# EAGLE board PCB_heatedbed_Mk2a (EAGLE 6.4)
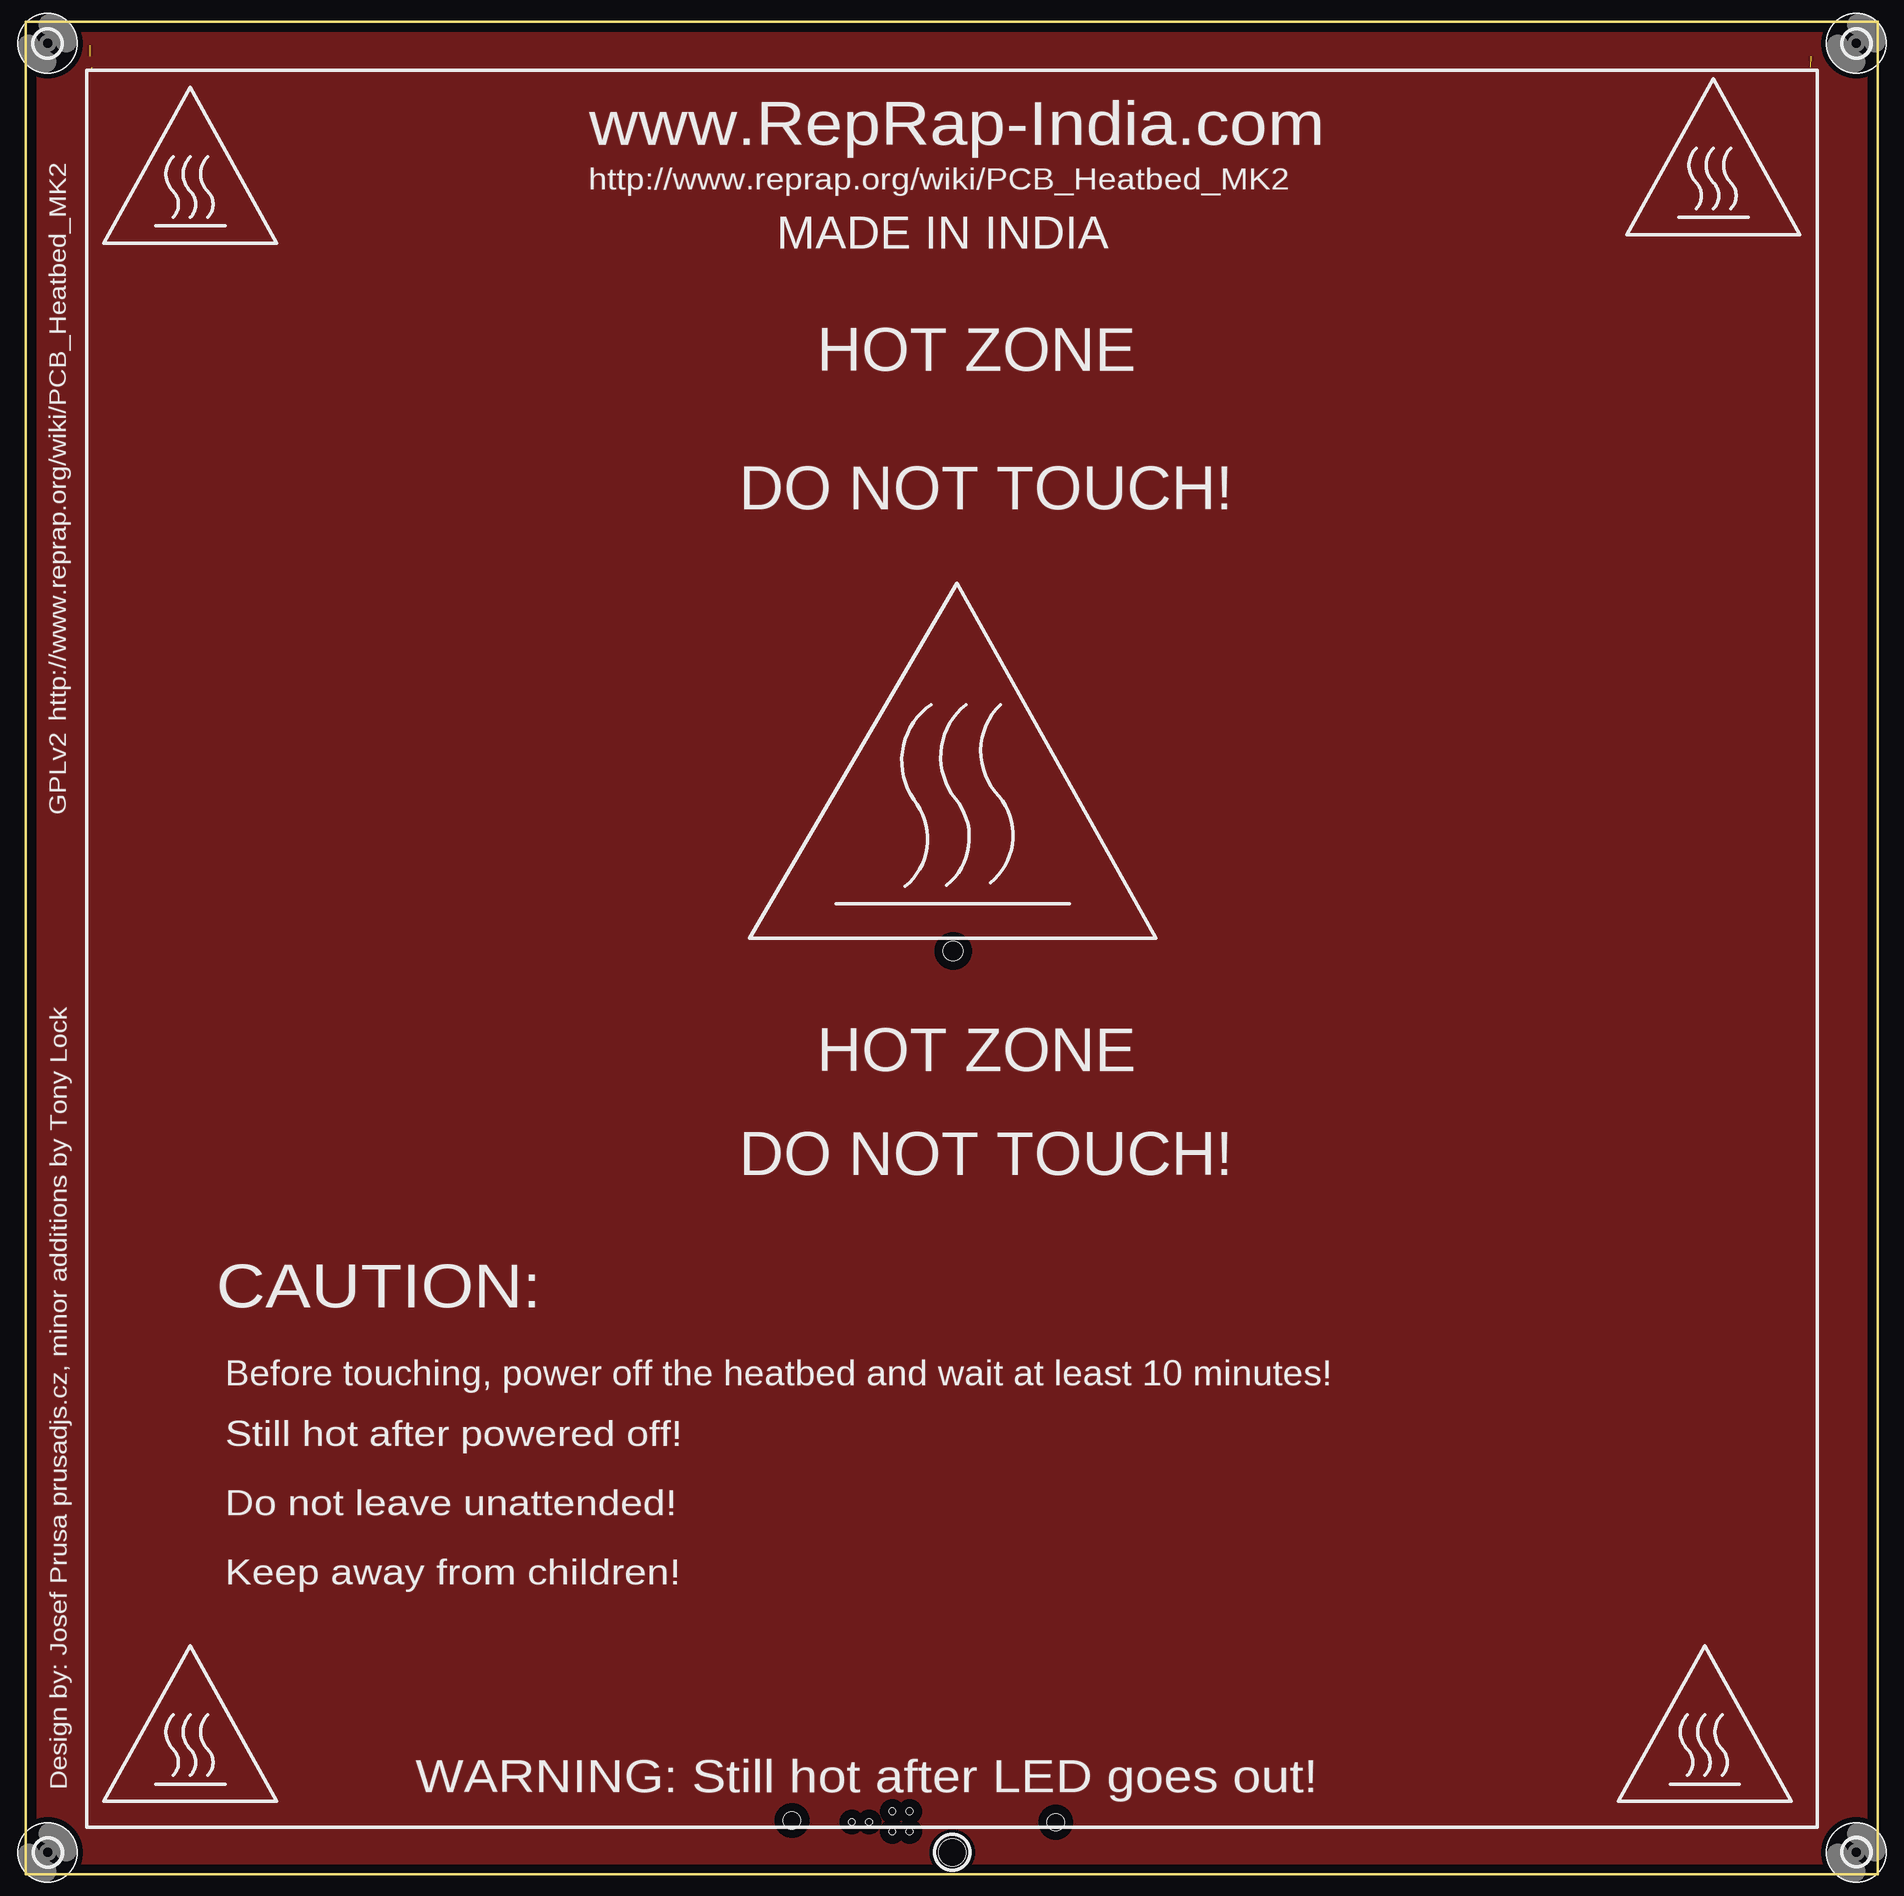
[diagram p0: board, top side]
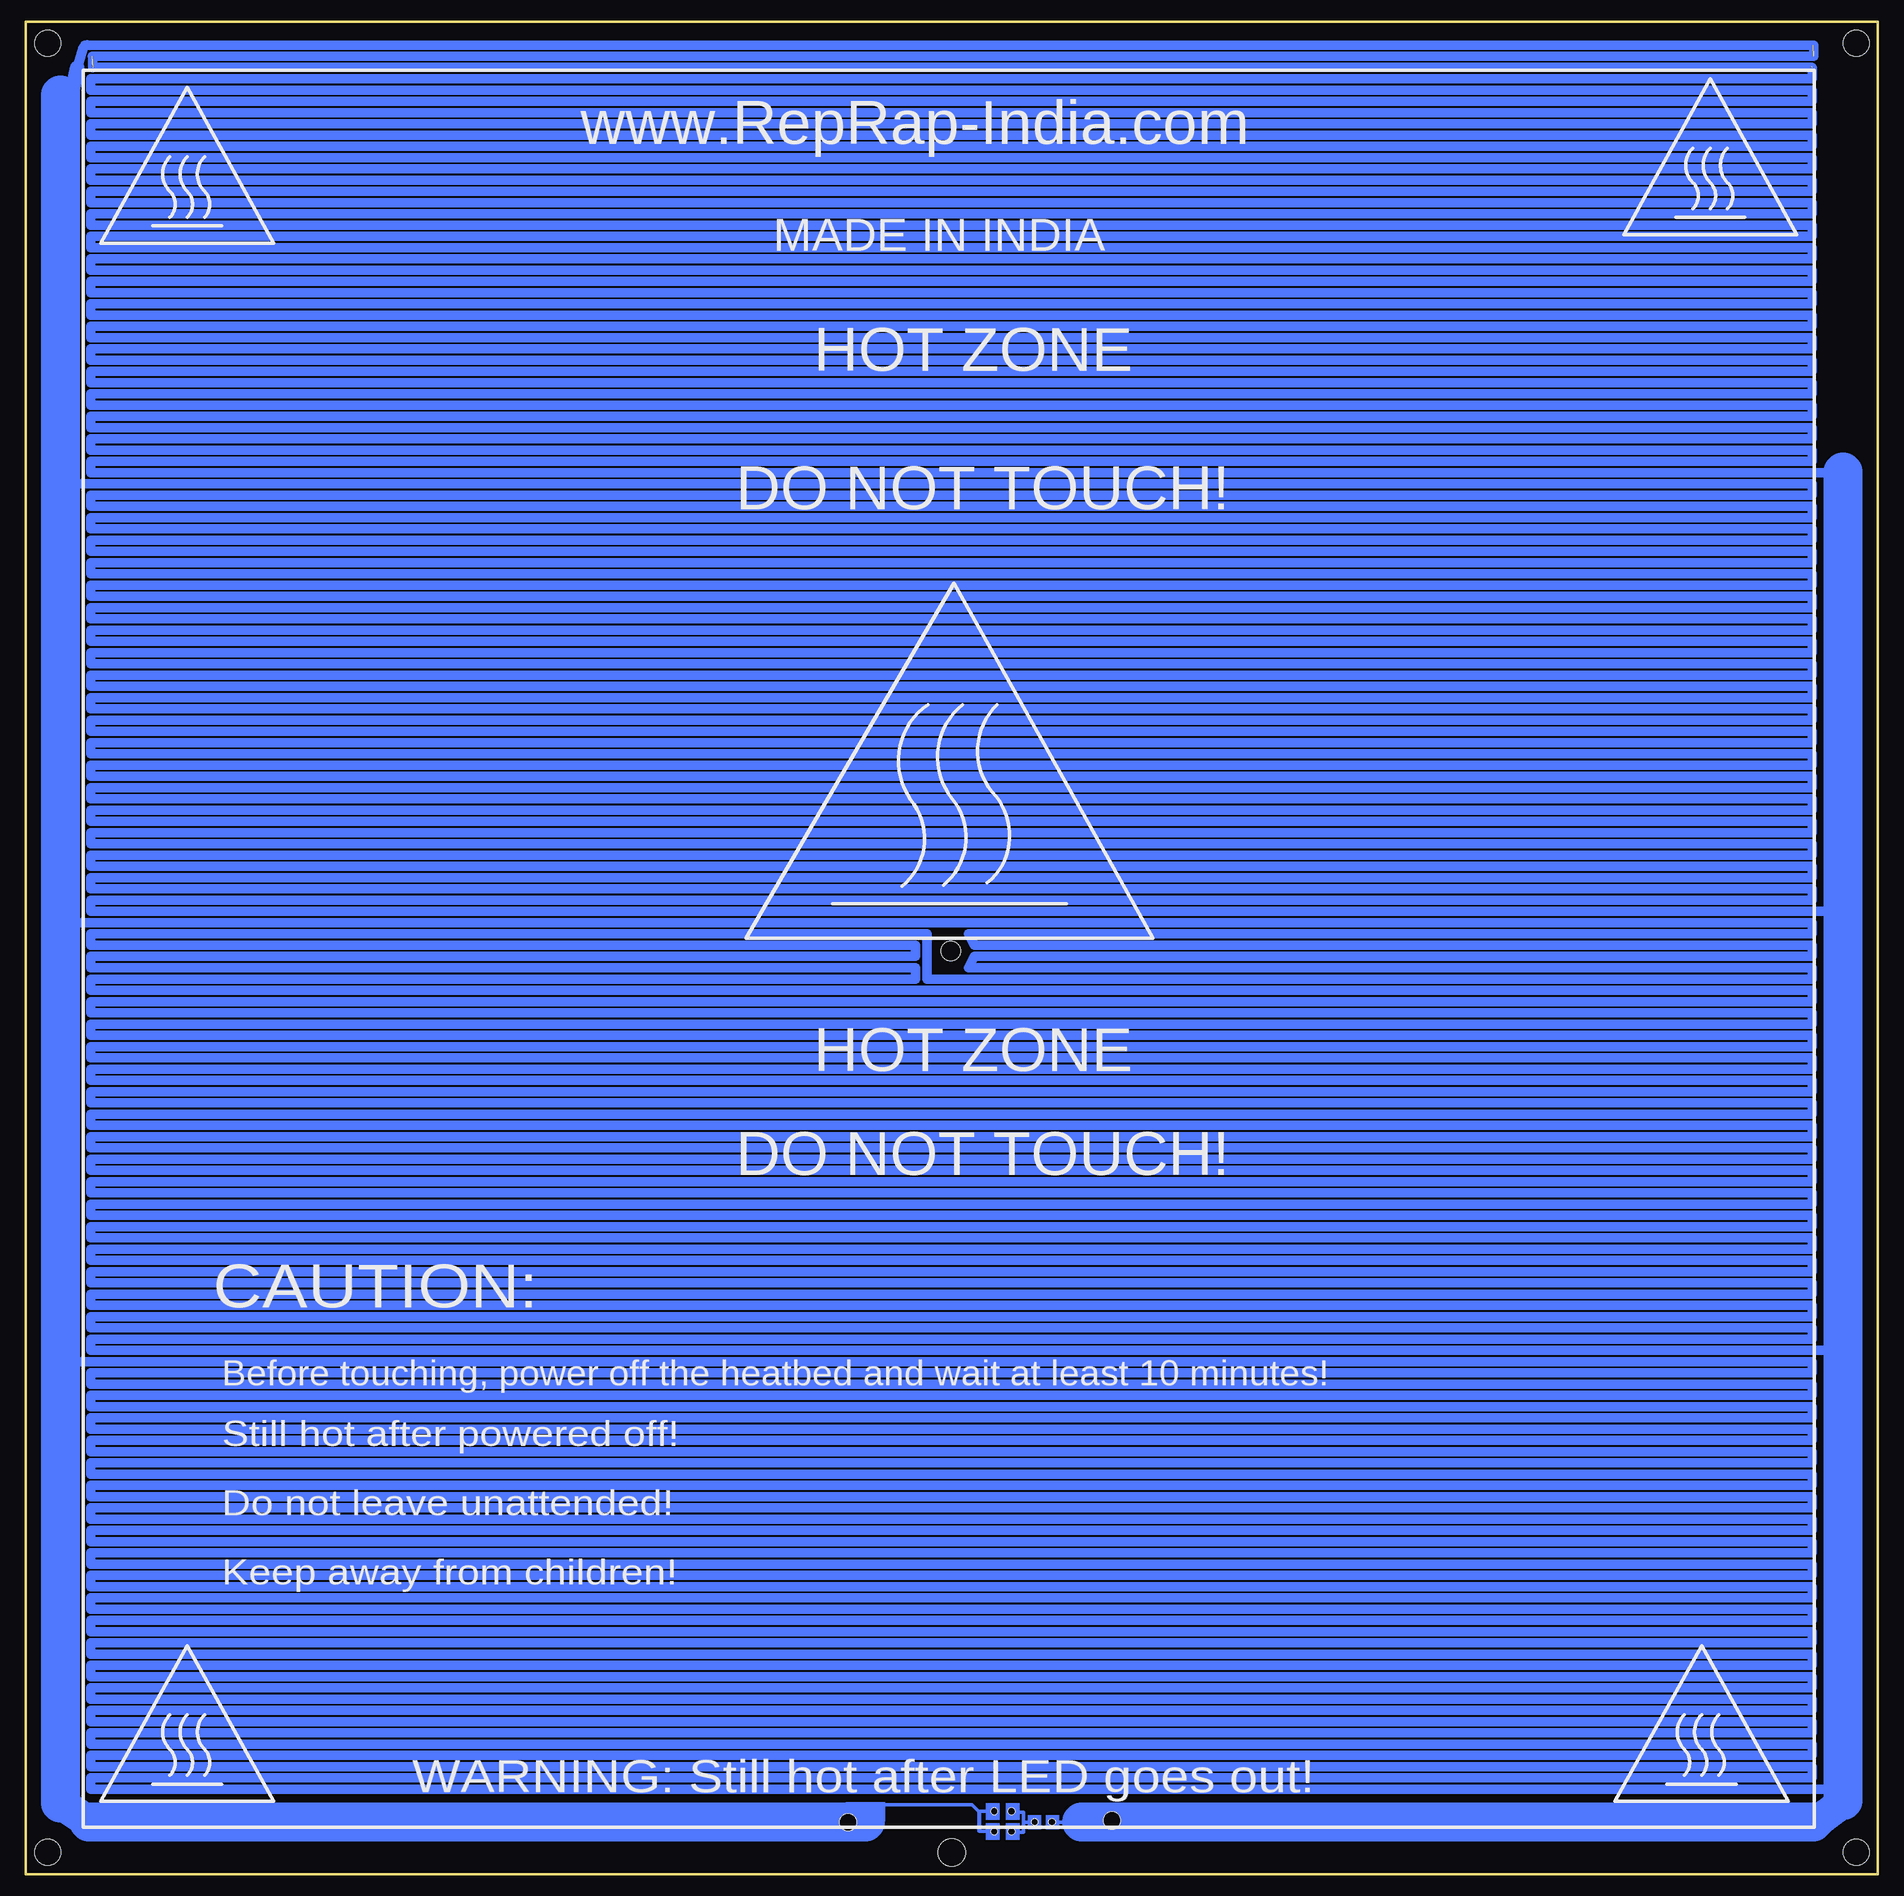
[diagram p1: board, bottom side, seen from below]

Size 214 x 214 mm. Coordinates in mm from the lower left corner, seen from the top.
Outline: 0,0 214,0 214,214 0,214 0,0
Copper layers (1*16): Top 0.035mm / dielectric 1.5mm / Bottom 0.035mm
Design rules "default": minimum track width 10mil, minimum drill 24mil, track to track 8mil, track to pad 8mil, pad to pad 8mil, via to via 8mil, smd to smd 8mil, copper to edge 40mil, drill to drill 8mil, minimum pad ring 10mil, minimum via ring 8mil, stop-mask expansion 4mil, vias tented up to drill 0mil, thermal gap 10mil
Holes 2.3 mm at 107.14,106.64 107.14,106.64
Holes 0.8 mm at 97.44,6 95.44,6 100.11,7.24 102.11,7.24 100.11,4.92 102.11,4.92
Holes 3.2 mm at 107.03,2.5
Holes 2 mm at 119,5.96 88.51,6.18

## Footprints (pad centres in the part's own frame; a part is rotated, then mirrored left to right if it is on the bottom)
3,0 = hole 3: 0,0

## Placement (x,y rotation side)
E$1  [3,0]  211.5,2.5 0 top
E$2  [3,0]  2.5,2.5 0 top
E$3  [3,0]  2.5,211.5 0 top
E$4  [3,0]  211.5,211.5 0 top

## Library data of the parts
E$1-E$4 = holes

## Tracks (layer width: path | path; a pad name or v marks a point on that pad's centre or on a via)
S$1
  Bottom 0.406: 103.8,7.19 103.85,7.19 104.68,8.02 116.18,8.02 116.21,8.05
S$2
  Bottom 0.305: 103.91,4.97 103.11,4.97
S$3
  Bottom 1.1: 6.3,9.8 206.5,9.8 206.5,11.1 7.6,11.1 7.6,12.4 206.5,12.4 206.5,13.7 7.6,13.7 7.6,15 206.5,15 206.5,16.3 7.6,16.3 7.6,17.6 206.5,17.6 206.5,18.9 7.6,18.9 7.6,20.2 206.5,20.2 206.5,21.5 7.6,21.5 7.6,22.8 206.5,22.8 206.5,24.1 7.6,24.1 7.6,25.4 206.5,25.4 206.5,26.7 7.6,26.7 7.6,28 206.5,28 206.5,29.3 7.6,29.3 7.6,30.6 206.5,30.6 206.5,31.9 7.6,31.9 7.6,33.2 206.5,33.2 206.5,34.5 7.6,34.5 7.6,35.8 206.5,35.8 206.5,37.1 7.6,37.1 7.6,38.4 206.5,38.4 206.5,39.7 7.6,39.7 7.6,41 206.5,41 206.5,42.3 7.6,42.3 7.6,43.6 206.5,43.6 206.5,44.9 7.6,44.9 7.6,46.2 206.5,46.2 206.5,47.5 7.6,47.5 7.6,48.8 206.5,48.8 206.5,50.1 7.6,50.1 7.6,51.4 206.5,51.4 206.5,52.7 7.6,52.7 7.6,54 206.5,54 206.5,55.3 7.6,55.3 7.6,56.6 206.5,56.6 206.5,57.9 7.6,57.9 7.6,59.2 207.8,59.2
S$4
  Bottom 1.1: 206.5,102.1 7.6,102.1 7.6,100.8 206.5,100.8 206.5,99.5 7.6,99.5 7.6,98.2 206.5,98.2 206.5,96.9 7.6,96.9 7.6,95.6 206.5,95.6 206.5,94.3 7.6,94.3 7.6,93 206.5,93 206.5,91.7 7.6,91.7 7.6,90.4 206.5,90.4 206.5,89.1 7.6,89.1 7.6,87.8 206.5,87.8 206.5,86.5 7.6,86.5 7.6,85.2 206.5,85.2 206.5,83.9 7.6,83.9 7.6,82.6 206.5,82.6 206.5,81.3 7.6,81.3 7.6,80 206.5,80 206.5,78.7 7.6,78.7 7.6,77.4 206.5,77.4 206.5,76.1 7.6,76.1 7.6,74.8 206.5,74.8 206.5,73.5 7.6,73.5 7.6,72.2 206.5,72.2 206.5,70.9 7.6,70.9 7.6,69.6 206.5,69.6 206.5,68.3 7.6,68.3 7.6,67 206.5,67 206.5,65.7 7.6,65.7 7.6,64.4 206.5,64.4 206.5,63.1 7.6,63.1 7.6,61.8 206.5,61.8 206.5,60.5 6.3,60.5
S$5
  Bottom 1.1: 6.3,111.2 206.5,111.2 206.5,112.5 7.6,112.5 7.6,113.8 206.5,113.8 206.5,115.1 7.6,115.1 7.6,116.4 206.5,116.4 206.5,117.7 7.6,117.7 7.6,119 206.5,119 206.5,120.3 7.6,120.3 7.6,121.6 206.5,121.6 206.5,122.9 7.6,122.9 7.6,124.2 206.5,124.2 206.5,125.5 7.6,125.5 7.6,126.8 206.5,126.8 206.5,128.1 7.6,128.1 7.6,129.4 206.5,129.4 206.5,130.7 7.6,130.7 7.6,132 206.5,132 206.5,133.3 7.6,133.3 7.6,134.6 206.5,134.6 206.5,135.9 7.6,135.9 7.6,137.2 206.5,137.2 206.5,138.5 7.6,138.5 7.6,139.8 206.5,139.8 206.5,141.1 7.6,141.1 7.6,142.4 206.5,142.4 206.5,143.7 7.6,143.7 7.6,145 206.5,145 206.5,146.3 7.6,146.3 7.6,147.6 206.5,147.6 206.5,148.9 7.6,148.9 7.6,150.2 206.5,150.2 206.5,151.5 7.6,151.5 7.6,152.8 206.5,152.8 206.5,154.1 7.6,154.1 7.6,155.4 206.5,155.4 206.5,156.7 7.6,156.7 7.6,158 206.5,158 206.5,159.3 7.6,159.3 7.6,160.6 207.8,160.6
S$6  (3 unrouted)
  Bottom 1.1: 7.6,208.7 7.6,207.4 206.5,207.4 206.5,206.1 7.6,206.1 7.6,204.8 206.5,204.8 206.5,203.5 7.6,203.5 7.6,202.2 206.5,202.2 206.5,200.9 7.6,200.9 7.6,199.6 206.5,199.6 206.5,198.3 7.6,198.3 7.6,197 206.5,197 206.5,195.7 7.6,195.7 7.6,194.4 206.5,194.4 206.5,193.1 7.6,193.1 7.6,191.8 206.5,191.8 206.5,190.5 7.6,190.5 7.6,189.2 206.5,189.2 206.5,187.9 7.6,187.9 7.6,186.6 206.5,186.6 206.5,185.3 7.6,185.3 7.6,184 206.5,184 206.5,182.7 7.6,182.7 7.6,181.4 206.5,181.4 206.5,180.1 7.6,180.1 7.6,178.8 206.5,178.8 206.5,177.5 7.6,177.5 7.6,176.2 206.5,176.2 206.5,174.9 7.6,174.9 7.6,173.6 206.5,173.6 206.5,172.3 7.6,172.3 7.6,171 206.5,171 206.5,169.7 7.6,169.7 7.6,168.4 206.5,168.4 206.5,167.1 7.6,167.1 7.6,165.8 206.5,165.8 206.5,164.5 7.6,164.5 7.6,163.2 206.5,163.2 206.5,161.9 6.3,161.9 | 206.24,208.72 7.65,208.74 | 206.32,210.02 7.42,210.01 | 207.22,211.28 7.45,211.29
S$7
  Bottom 3.3: 4,8.5 7.5,6
  Bottom 4.5: 7.5,6 92,6 | 4,8.5 4,162
S$8
  Bottom 0.305: 103.11,7.29 103.91,7.29 103.91,6.19
S$9
  pour Top: 213.55,0.5 0.45,0.5 0.45,213.5 213.65,213.5 213.55,0.55
S$10
  Bottom 0.406: 103.13,4.91 103.79,4.91
S$11
  Bottom 0.406: 98.73,4.83 99.56,4.83
S$13
  Bottom 3.81: 206.7,6 210,8.2
  Bottom 4.5: 210,8.2 210,205.5 | 117,6 206.7,6
S$15
  Bottom 0.406: 103.78,5.04 103.79,5.04 103.79,7.23 103.13,7.23
S$17
  Bottom 1.1: 7.6,108.6 7.6,109.9 207.8,109.9
S$18
  Bottom 0.305: 103.91,6.09 103.91,4.99
S$19
  Bottom 1.27: 209.5,206 209,205.5 209,205
S$20
  Bottom 1.1: 7.6,108.6 105.1,108.6 104.4,107.3 7.6,107.3 7.6,106 104.4,106 105.1,104.7 7.6,104.7
S$21
  Bottom 1.1: 207.1,211.3 207.4,211 208.1,208.7
  Bottom 1.676: 208.8,205.1 208.1,208.7
S$22
  Bottom 1.1: 3.8,7 6.2,5
S$23
  Bottom 1.1: 3.8,6.8 6,5.2
S$24
  Bottom 1.1: 206.5,104.7 206.5,106
S$25
  Bottom 0.305: 206.95,211.75 arc90 206.85,211.65
S$26
  Bottom 1.1: 206.5,108.6 206.5,107.3
S$27
  Bottom 1.1: 206.5,106 111.2,106
S$28
  Bottom 1.1: 7.6,104.7 7.6,103.4 109.9,103.4
S$29
  Bottom 1.1: 109.9,108.6 111.3,108.6 205.1,108.6 206.5,108.6
S$30
  Bottom 1.1: 206.5,104.7 111.2,104.7
S$31
  Bottom 1.1: 206.5,103.4 111.2,103.4
S$32
  Bottom 1.1: 109.9,103.4 109.9,108.6
S$33
  Bottom 1.1: 111.2,107.3 112.6,107.3 205.1,107.3 206.5,107.3
S$34
  Bottom 1.1: 111.2,106 111.2,107.3
S$35
  Bottom 1.1: 111.2,103.4 111.2,104.7
S$36
  Bottom 1.1: 206.5,103.4 206.5,102.1
S$37
  Bottom 0.406: 94.16,5.98 94.92,5.98 94.92,5.97
S$38
  Bottom 0.406: 98.73,6 97.94,6 | 98.73,6 98.74,6 | 98.73,7.13 98.73,6
S$39
  Bottom 0.406: 98.73,7.15 99.56,7.15
S$40
  Bottom 0.406: 98.72,6.05 98.72,4.96
S$46
  Bottom 1.1: 7.4,210 7.4,211.3
S$47
  Bottom 1.1: 206.3,210 206.3,208.7
(copper drawn outside any net)
  shapes: Bottom area x7

## Text on the board
bPlace: HOT ZONE | DO NOT TOUCH! | HOT ZONE | DO NOT TOUCH! | CAUTION: | Before touching, power off the heatbed and wait at least 10 minutes! | Still hot after powered off! | Do not leave unattended! | Keep away from children! | WARNING: Still hot after LED goes out!
tNames: www.RepRap-India.com | http://www.reprap.org/wiki/PCB_Heatbed_MK2 | MADE IN INDIA | http://www.reprap.org/wiki/PCB_Heatbed_MK2 | GPLv2 | Design by: Josef Prusa prusadjs.cz, minor additions by Tony Lock
bNames: www.RepRap-India.com | MADE IN INDIA
tPlace2: HOT ZONE | DO NOT TOUCH! | HOT ZONE | DO NOT TOUCH! | CAUTION: | Before touching, power off the heatbed and wait at least 10 minutes! | Still hot after powered off! | Do not leave unattended! | Keep away from children! | WARNING: Still hot after LED goes out!